# Altium PCB Ttem_Lumineux.PcbDoc
Units mm, origin at the board's own origin, x right, y up, seen from the top; angles counter-clockwise.
Board outline 109.47 x 87.25 mm, 2 copper layers (Top Layer, Bottom Layer); 60 components, 47 nets, 231 pads, 671 vias.
Unrouted connection lines stored in the file: 53.
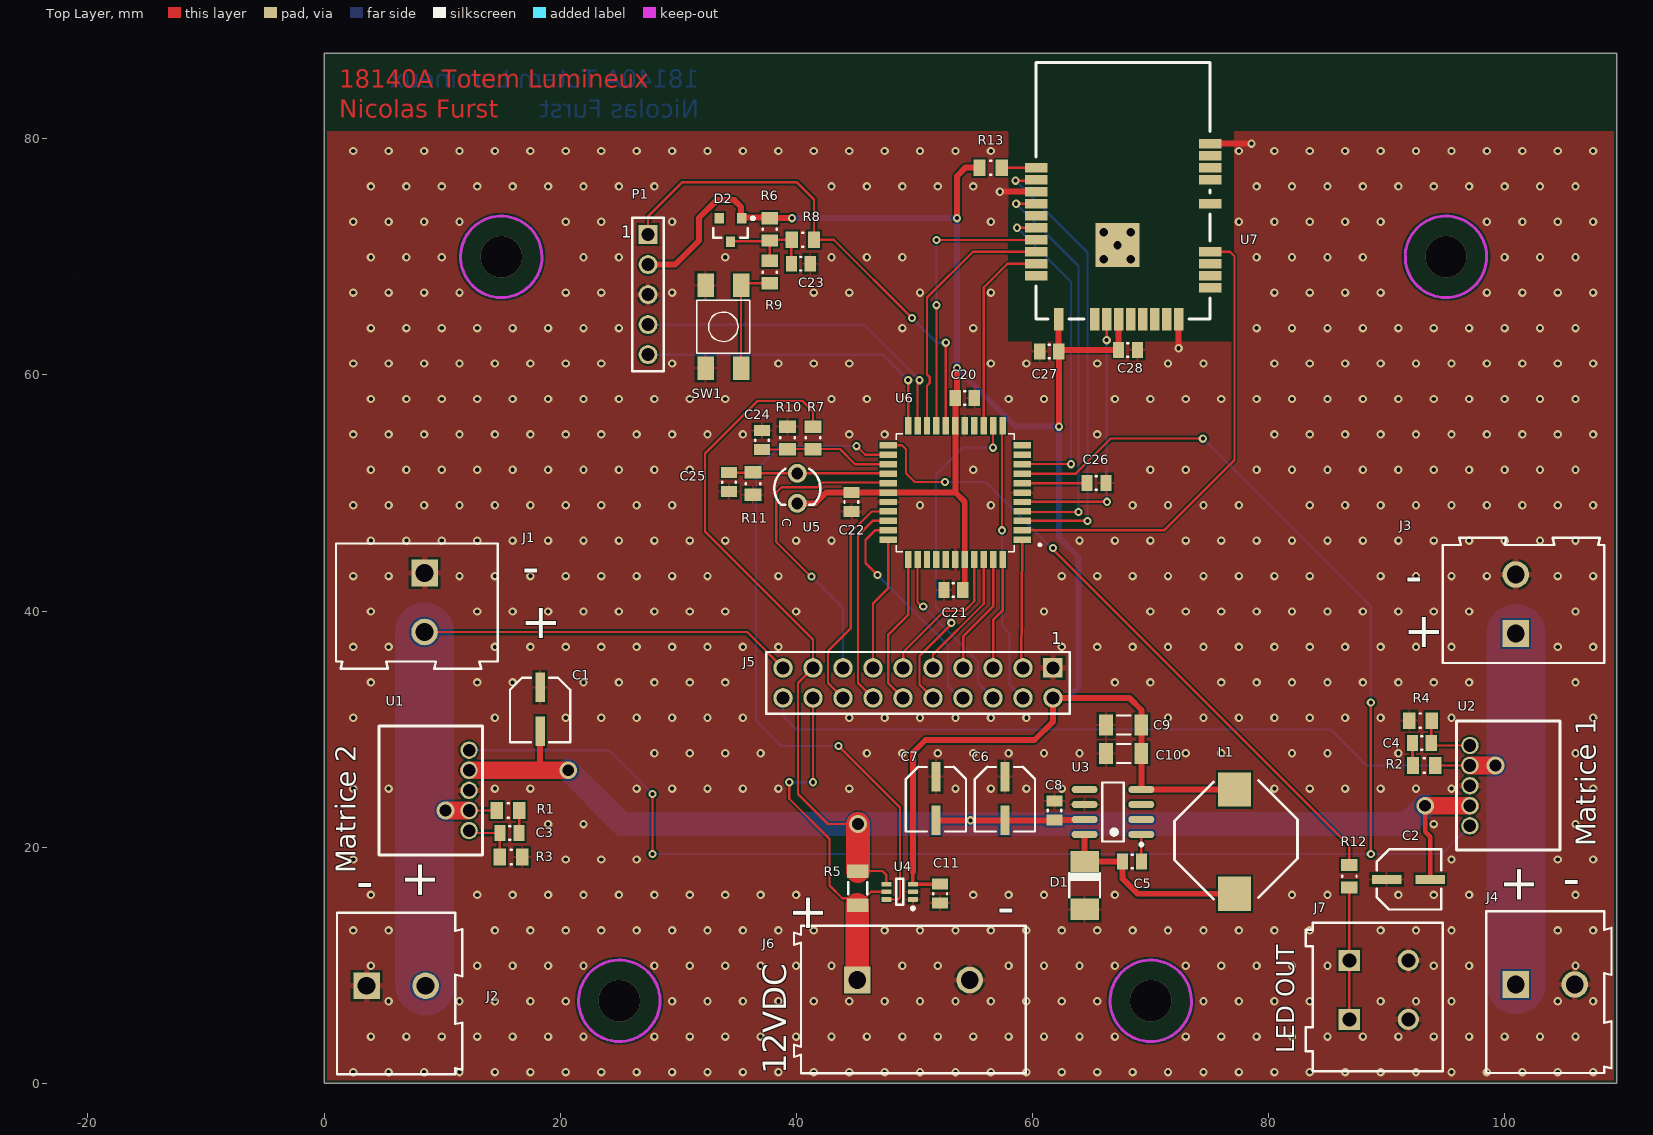
[diagram p0: Top Layer view]
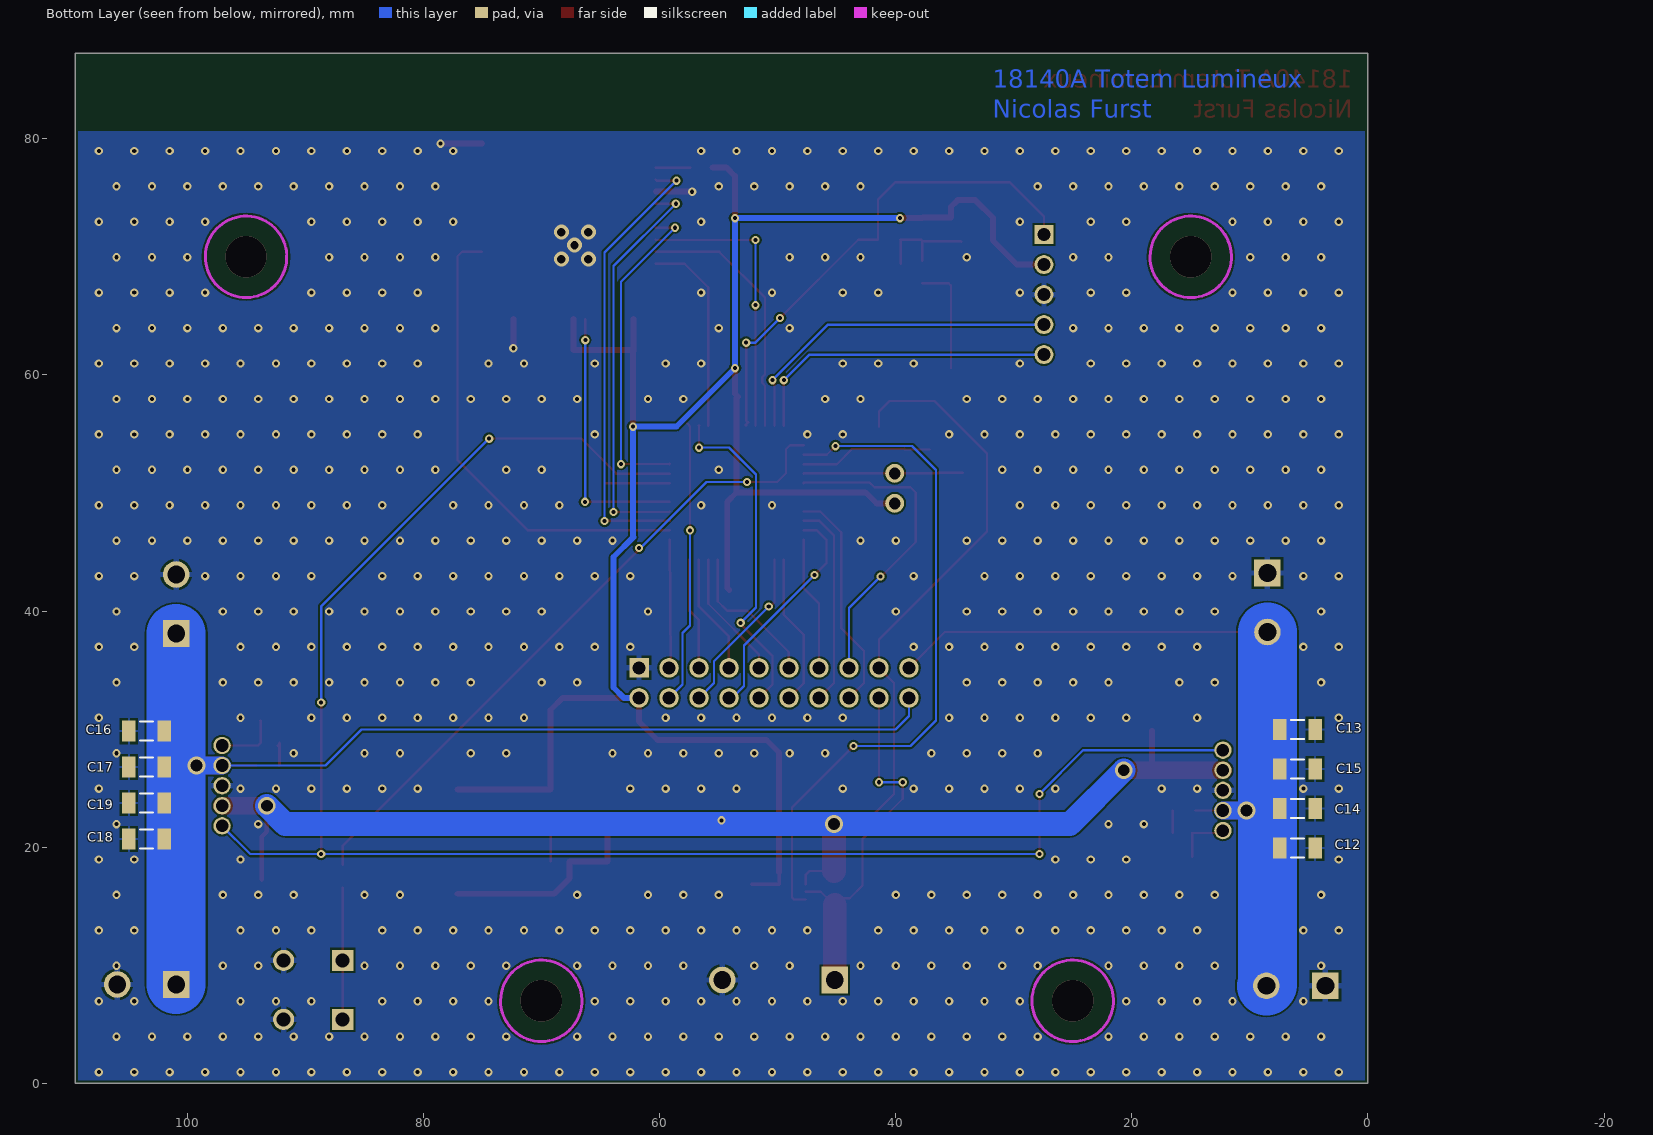
[diagram p1: Bottom Layer view, seen from below]

## Layer stack, top to bottom
Top Solder: solder mask 0.0102, Solder Resist, Dk 3.5
Top Layer: signal copper 0.0356
Dielectric 1: dielectric 0.32, FR-4, Dk 4.8
Bottom Layer: signal copper 0.0356
Bottom Solder: solder mask 0.0102, Solder Resist, Dk 3.5

## Board outline
0,0 0,87.249 109.474,87.249 109.474,0

## Design rules (kind name [scope] priority, off if disabled: settings)
BoardOutlineClearance [All] p1: gap=0.25 ignorepadtopadclearanceinfootprint=FALSE except(0: Arc-SplitContinuation Track-SplitContinuation SMDPad-SplitContinuation THPad-SplitContinuation Via-SplitContinuation Fill-SplitContinuation Poly-SplitContinuation Region-SplitContinuation Text-SplitContinuation)
Clearance Clearance-xPP-xTP-xTT [All] p1: gap=0.15 ignorepadtopadclearanceinfootprint=FALSE except(0: Arc-Hole Track-Hole SMDPad-Hole THPad-Hole Via-Hole Fill-Hole Poly-Hole Region-Hole Text-Hole)
ComponentClearance [All] p1: gap=0.25 collisioncheckmode=3 verticalgap=0.25 showdistances=FALSE
DiffPairsRouting [All] p1: maxlimit=0.25 minlimit=0.25 mostfreqgap=0.25 toplayer_minwidth=0.381 toplayer_maxwidth=0.381 toplayer_prefwidth=0.381 bottomlayer_minwidth=0.381 bottomlayer_maxwidth=0.381 bottomlayer_prefwidth=0.381 maxuncoupledlength=12.5
Height [All] p1: minheight=0 maxheight=25 prefheight=12.5
HoleSize HoleSize-PTH [All] p1: absolutevalues=TRUE maxlimit=10 minlimit=0.25 maxpercent=80.000 minpercent=20.000
HoleToHoleClearance [All] p1: gap=0.35 allowstackedmicrovias=TRUE
MinimumAnnularRing "Minimum IAR  >0.45mm" [((ObjectKind = 'Pad') OR (ObjectKind = 'Via')) And (Layer = 'MultiLayer') And (HoleDiameter > AsMM(0.45))] p1: minimumring=0.175 // minimum inner annular ring for pads > 0.45mm finished hole size
MinimumAnnularRing "Minimum IAR <=0.45mm" [((ObjectKind = 'Pad') OR (ObjectKind = 'Via')) And (Layer = 'MultiLayer') And (HoleDiameter <= AsMM(0.45))] p2: minimumring=0.175 // minimum inner annular ring for pads <= 0.45mm finished hole size
MinimumSolderMaskSliver [All] p1: minsoldermaskwidth=0.08
PlaneClearance PlaneClearance-IPI [All] p1: clearance=0.25
PlaneConnect [All] p1: planeconnectstyle=Relief reliefexpansion=0.175 reliefentries=4 reliefconductorwidth=0.2 reliefairgap=0.2
PolygonConnect PolygonConnect-xTW [All] p1: thpad.connectstyle=Relief thpad.reliefconductorwidth=0.5 thpad.reliefentries=4 thpad.polygonreliefangle="90 Angle" thpad.airgapwidth=0.2 smdpad.connectstyle=Relief smdpad.reliefconductorwidth=0.2 smdpad.reliefentries=4 smdpad.polygonreliefangle="90 Angle" smdpad.airgapwidth=0.2 via.connectstyle=Direct via.reliefconductorwidth=0.2 via.reliefentries=4 via.polygonreliefangle="90 Angle" via.airgapwidth=0.2
RoutingCorners [All] p1: cornerstyle=45-Degree minsetback=2.5 maxsetback=2.5
RoutingVias RoutingViasES [(ObjectKind = 'Via')] p1: holewidth=0.3 width=0.65 viastyle="Through Hole" minholewidth=0.25 minwidth=0.61 maxholewidth=0.45 maxwidth=0.8 // finishet hole size <= 0.45mm
SilkToSilkClearance [All] p1: silktosilkclearance=0.2
SilkToSolderMaskClearance SilkscreenOverComponentPads [IsPad] p1: minsilkscreentomaskgap=0.2 clearancetoexposedcopper=TRUE
SolderMaskExpansion [All] p1: expansion=0
UnRoutedNet [All] p1: checkbadconnections=TRUE
Width Width-xTW [All] p1: maxlimit=10 minlimit=0.15 preferedwidth=0.2
18 further rules are at their usual default settings.

## Classes and differential pairs
net class Power: 5V_1 5V_2 12Vbatt Vbatt
component class Pic: C20 C21 C22 C23 C24 C25 C26 C27 C28 D2 J7 P1 R6 R7 R8 R9 R10 R11 R12 R13 SW1 U5 U6 U7
component class Alim: C1 C2 C3 C4 C5 C6 C7 C8 C9 C10 C11 C12 C13 C14 C15 C16 C17 C18 C19 D1 J1 J2 J3 J4 J5 J6 L1 R1 R2 R3 R4 R5 U1 U2 U3 U4

## Components (designator, comment, footprint, x,y, rotation, side; value= is the part's Value field where it differs from the comment)
C1 "47uF" Capacitor 18.288,31.695 r90 top
C2 "47uF" Capacitor 91.821,17.272 r180 top
C3 "39nF" CAPC0805(2012)155_L 15.708,21.209 r0 top value=4.7uF
C4 "39nF" CAPC0805(2012)155_L 92.964,28.829 r0 top value=4.7uF
C5 "10nF" CAPC0805(2012)155_L 68.419,18.796 r180 top value=4.7uF
C6 "47uF" Capacitor 57.658,24.13 r90 top
C7 "47uF" Capacitor 51.816,24.13 r90 top
C8 "100n" CAPC0805(2012)155_L 61.849,23.114 r90 top value=4.7uF
C9 "47uF" CAPC1206(3216)190_N 67.715,30.353 r0 top
C10 "47uF" CAPC1206(3216)190_N 67.715,27.94 r0 top
C11 "100n" CAPC0805(2012)155_L 52.17,16.079 r270 top value=4.7uF
C12 "47uF" CAPC1206(3216)190_N 5.969,19.939 r0 bottom
C13 "47uF" CAPC1206(3216)190_N 5.969,29.972 r0 bottom
C14 "47uF" CAPC1206(3216)190_N 5.969,23.283 r0 bottom
C15 "47uF" CAPC1206(3216)190_N 5.969,26.628 r0 bottom
C16 "47uF" CAPC1206(3216)190_N 103.426,29.845 r180 bottom
C17 "47uF" CAPC1206(3216)190_N 103.426,26.797 r180 bottom
C18 "47uF" CAPC1206(3216)190_N 103.426,20.701 r180 bottom
C19 "47uF" CAPC1206(3216)190_N 103.426,23.749 r180 bottom
C20 "100n" CAPC0805(2012)155_L 54.255,58.039 r180 top value=4.7uF
C21 "100n" CAPC0805(2012)155_L 53.283,41.783 r0 top value=4.7uF
C22 "100n" CAPC0805(2012)155_L 44.647,49.238 r90 top value=4.7uF
C23 "" CAPC0805(2012)155_L 40.372,69.412 r180 top value=4.7uF
C24 "100n" CAPC0805(2012)155_L 37.084,54.483 r270 top value=4.7uF
C25 "100n" CAPC0805(2012)155_L 34.29,50.927 r90 top value=4.7uF
C26 "10uF" CAPC0805(2012)155_L 65.405,50.838 r180 top value=4.7uF
C27 "100n" CAPC0805(2012)155_L 61.403,61.976 r0 top value=4.7uF
C28 "100n" CAPC0805(2012)155_L 68.072,62.103 r180 top value=4.7uF
D1 "SK32" DO-214AC 64.402,16.771 r270 top
D2 "BAS40-06LT1G" ONSC-SOT-23-3-318-08_V 34.417,72.263 r270 top
J1 "691211720002" 691211720002 7.859,40.727 r270 top
J2 "691211720002" 691211720002 6.096,7.62 r0 top locked
J3 "691211720002" 691211720002 101.568,40.6 r90 top locked
J4 "691211720002" 691211720002 103.418,7.732 r0 top locked
J5 "61302021121" 61302021121 50.292,33.924 r180 top
J6 "691250910002" 691250910002 49.911,7.112 r0 top locked
J7 "691411710002B" 691411710002B 88.921,7.321 r0 top locked
L1 "DO3308P-684" DO3308P 77.089,17.522 r90 top
P1 "61300511121" 61300511121 27.432,66.802 r270 top
R1 "47R" RESC0805(2012)_N 15.581,23.114 r180 top value="1000000.00 Ohm"
R2 "47R" RESC0805(2012)_N 93.157,26.924 r0 top value="1000000.00 Ohm"
R3 "270R" RESC0805(2012)_N 15.835,19.177 r180 top value="1000000.00 Ohm"
R4 "270R" RESC0805(2012)_N 92.837,30.734 r0 top value="1000000.00 Ohm"
R5 "3mOhm" RESC1206(3216)_N 45.185,16.536 r270 top value="1000000.00 Ohm"
R6 "" RESC0805(2012)_N 37.743,72.333 r90 top value="1000000.00 Ohm"
R7 "82k" RESC0805(2012)_N 41.402,54.671 r90 top value="1000000.00 Ohm"
R8 "" RESC0805(2012)_N 40.537,71.444 r180 top value="1000000.00 Ohm"
R9 "" RESC0805(2012)_N 37.743,68.711 r90 top value="1000000.00 Ohm"
R10 "18k" RESC0805(2012)_N 39.243,54.671 r270 top value="1000000.00 Ohm"
R11 "300R" RESC0805(2012)_N 36.322,50.8 r90 top value="1000000.00 Ohm"
R12 "0R" RESC0805(2012)_N 86.821,17.547 r270 top value="1000000.00 Ohm"
R13 "1M" RESC0805(2012)_N 56.449,77.547 r180 top value="1000000.00 Ohm"
SW1 "430181038816" 430181038816 33.806,64.078 r90 top
U1 "DC-DC _12to5V" DC-DC 12.279,28.224 r270 top
U2 "DC-DC _12to5V" DC-DC 97.028,21.814 r90 top
U3 "LM2674M-3.3" M08A_N 66.802,22.987 r180 top
U4 "INA214AIDCKT" DCK0006A_N 48.741,16.229 r180 top
U5 "TEPT4400" "Type 3mm" 40.075,50.392 r270 top
U6 "PIC32MX130F256D" QFP80P1200X1200X120-44N 53.455,50.038 r180 top
U7 "ATWILC1000" ATWILC1000 60.303,64.723 r0 top locked

## Footprints (in the part's own frame and the unit in brackets; to place one, negate y for a bottom-side part, rotate by r counter-clockwise, add the part's x,y. Pads: shape width x height; smd on the part's side, far side on the other; paste and mask are expansions set on the pad)
61300511121 [mm] "Pin Header, pitch 2.54 mm, THT, Vertical, single row, 5p"
  rect 1.6x1.6 hole 1.1: 1(-5.08,0)
  round 1.6 hole 1.1: 2(-2.54,0) 3(0,0) 4(2.54,0) 5(5.08,0)
  silkscreen extent -6.5,-1.35 6.5,1.35, body extent -6.35,-1.27 6.35,1.27, height 8.57
61302021121 [mm] "Pin Header, pitch 2.54 mm, THT, Vertical, dual row, 20p"
  rect 1.65x1.65 hole 1.1: 1(-11.43,-1.27)
  round 1.65 hole 1.1: 2(-11.43,1.27) 3(-8.89,-1.27) 4(-8.89,1.27) 5(-6.35,-1.27) 6(-6.35,1.27) 7(-3.81,-1.27) 8(-3.81,1.27) 9(-1.27,-1.27) 10(-1.27,1.27) 11(1.27,-1.27) 12(1.27,1.27) 13(3.81,-1.27) 14(3.81,1.27) 15(6.35,-1.27) 16(6.35,1.27) 17(8.89,-1.27) 18(8.89,1.27) 19(11.43,-1.27) 20(11.43,1.27)
  silkscreen extent -12.85,-2.62 12.85,2.62, body extent -12.7,-2.54 12.7,2.54, height 8.59
430181038816 [mm] "4.5*4.5mm vertical type, SMD, height 3.8mm, black actuator, 160gf, T&R"
  rect 2x1.4 smd: 1(-3.5,1.5) 2(3.5,1.5) 3(-3.5,-1.5) 4(3.5,-1.5)
  silkscreen extent -2.25,-2.25 2.25,2.25, body extent -3.75,-2.25 3.75,2.25, height 3.78
691211720002 [mm] "5,00mm - modular - green -45° entry with rising cage clamp - 02p"
  rect 2.25x2.25 hole 1.5: 1(-2.5,0.65)
  round 2.25 hole 1.5: 2(2.5,0.65)
  silkscreen extent -5,-6.85 5.6,6.85, body extent -5,-6.85 5.6,6.85, height 15.72
691250910002 [mm] "Serie 2509 - 9.52 mm _ 2 pins"
  rect 2.25x2.25 hole 1.5: 1(-4.76,1.65)
  round 2.25 hole 1.5: 2(4.76,1.65)
  silkscreen extent -10.12,-6.25 9.52,6.25, body extent -10.12,-6.25 9.52,6.25, height 21.6
691411710002B [mm] "5.00 mm Screwless Horizontal Entry - 2.0 mm2 Wires, 2p"
  rect 1.8x1.8 hole 1.2: 1(-2.1,-1.9) 1(-2.1,3.1)
  round 1.8 hole 1.2: 2(2.9,-1.9) 2(2.9,3.1)
  silkscreen extent -5.8,-6.3 5.8,6.3, body extent -5.8,-6.3 5.8,6.3, height 15.65
ATWILC1000 [mm]
  rect 1.9x0.8 smd: 1(14.73,2.67) 2(14.73,3.686) 3(14.73,4.702) 4(14.73,5.718) 5(14.73,9.782) 6(14.73,11.814) 7(14.73,12.83) 8(14.73,13.846) 9(14.73,14.862) 10(0,12.824) 11(0,11.808) 12(0,10.792) 13(0,9.776) 14(0,8.76) 15(0,7.744) 16(0,6.728) 17(0,5.712) 18(0,4.696) 19(0,3.68)
  rect 0.8x1.9 smd: 20(1.9,0) 21(4.948,0) 22(5.964,0) 23(6.98,0) 24(7.996,0) 25(9.012,0) 26(10.028,0) 27(11.044,0) 28(12.06,0)
  rect 3.7x3.7 smd: 29(6.88,6.27)
  silkscreen extent 0,0 14.73,21.72
Capacitor [mm]
  rect 2.5x0.8 smd: 1(-1.85,0) 2(1.85,0)
  silkscreen extent -2.79,-2.55 2.67,2.55
CAPC0805(2012)155_L [mm] "Chip Capacitor, Body 2.0x1.2mm, Height 1.55mm, IPC High Density"
  rect 0.95x1.35 smd: 1(-0.8,0) 2(0.8,0)
  silkscreen extent -0.05,-0.58 0.05,0.58, body extent -1.1,-0.72 1.1,0.72, height 1.55
CAPC1206(3216)190_N [mm] "Chip Capacitor, Body 3.2x1.6mm, Height 1.9mm, IPC Medium Density"
  rect 1.15x1.8 smd: 1(-1.5,0) 2(1.5,0)
  silkscreen extent -0.55,-0.8 0.55,0.8, body extent -1.7,-0.9 1.7,0.9, height 1.9
DC-DC [mm]
  round 1.47 hole 1.07: 1(0,0) 2(1.7,0) 3(3.4,0) 4(5.11,0) 5(6.81,0)
  silkscreen extent -2.06,-7.62 8.86,1.14
DCK0006A_N [mm] "SOT23, 6-Leads, Body 2.15x1.4mm, Pitch 0.65mm, IPC Medium Density"
  rrect25% 0.85x0.4 smd: 1(-1.125,0.65) 2(-1.125,0) 3(-1.125,-0.65) 4(1.125,-0.65) 5(1.125,0) 6(1.125,0.65)
  silkscreen extent -1.25,-1.1 0.3,1.52, body extent -1.14,-1 1.14,1, height 0.94
DO3308P [mm]
  rect 2.92x2.79 smd: 1(-1.46,0) 2(7.37,0)
  silkscreen extent -1.91,-5.33 8.13,5.08
DO-214AC [mm]
  rect 1.8x2.4 smd: 1(-2.025,0) 2(2.025,0)
  silkscreen extent -1.06,-1.3 1.02,1.3
M08A_N [mm] "SOIC, 8-Leads, Body 4.9x3.9mm, Pitch 1.27mm, IPC Medium Density"
  oval 2.2x0.6 smd: 1(-2.4,1.905) 2(-2.4,0.635) 3(-2.4,-0.635) 4(-2.4,-1.905) 5(2.4,-1.905) 6(2.4,-0.635) 7(2.4,0.635) 8(2.4,1.905)
  silkscreen extent -2.53,-2.5 0.9,2.88, body extent -2,-2.5 2,2.5, height 1.75
ONSC-SOT-23-3-318-08_V [mm] "SOT23, 3-Leads, Body 2.92x1.3mm, Pitch 0.95mm"
  rect 0.9x0.8 smd: 1(-1,0.95) 2(-1,-0.95) 3(1,0)
  silkscreen extent -1.12,-1.46 0.65,2.03, body extent -0.65,-1.46 0.65,1.46, height 1.11
QFP80P1200X1200X120-44N [mm]
  rect 1.47x0.55 smd: 1(-5.67,4) 2(-5.67,3.2) 3(-5.67,2.4) 4(-5.67,1.6) 5(-5.67,0.8) 6(-5.67,0) 7(-5.67,-0.8) 8(-5.67,-1.6) 9(-5.67,-2.4) 10(-5.67,-3.2) 11(-5.67,-4) 23(5.67,-4) 24(5.67,-3.2) 25(5.67,-2.4) 26(5.67,-1.6) 27(5.67,-0.8) 28(5.67,0) 29(5.67,0.8) 30(5.67,1.6) 31(5.67,2.4) 32(5.67,3.2) 33(5.67,4)
  rect 0.55x1.47 smd: 12(-4,-5.67) 13(-3.2,-5.67) 14(-2.4,-5.67) 15(-1.6,-5.67) 16(-0.8,-5.67) 17(0,-5.67) 18(0.8,-5.67) 19(1.6,-5.67) 20(2.4,-5.67) 21(3.2,-5.67) 22(4,-5.67) 34(4,5.67) 35(3.2,5.67) 36(2.4,5.67) 37(1.6,5.67) 38(0.8,5.67) 39(0,5.67) 40(-0.8,5.67) 41(-1.6,5.67) 42(-2.4,5.67) 43(-3.2,5.67) 44(-4,5.67)
  silkscreen extent -7.26,-5 5,5
RESC0805(2012)_N [mm] "Chip Resistor, Body 2.0x1.3mm, IPC Medium Density"
  rect 1.05x1.4 smd: 1(-0.95,0) 2(0.95,0)
  silkscreen extent -0.05,-0.6 0.05,0.6, body extent -1.1,-0.67 1.1,0.68, height 0.7
RESC1206(3216)_N [mm] "Chip Resistor, Body 3.2x1.6mm, IPC Medium Density"
  rect 1.15x1.8 smd: 1(-1.45,0) 2(1.45,0)
  silkscreen extent -0.5,-0.8 0.5,0.8, body extent -1.67,-0.87 1.67,0.87, height 0.75
"Type 3mm" [mm] "THT, LED-3mm, 2pin- Body 4.15mm(max)"
  round 1.6 hole 1: 1(1.27,0) 2(-1.27,0)
  silkscreen extent -1.66,-1.95 1.4,1.95, body extent -1.93,-1.94 1.87,1.94, height 10.5

## Part data
C1 C2 C6 C7: library part CMP-2000-06221-1, "Conductive Polymer Hybrid Aluminum Electrolytic Capacitor, 100 uF, +/- 20%, 50 V, -55 to 105 degC, 2-Pin SMD (G), RoHS, Tape and Reel", Capacitance=100uF, Case Diameter=10mm, Case Height=10.5mm, Case Length=10.2mm, Manufacturer=Panasonic, Maximum Operating Temperature=+105C, Minimum Operating Temperature=-55C, Package Description="2-Pin Surface Mount Device, Body 10.3 x 10.3 mm", Package Reference=ZA-G, Ripple Current=2A, Tolerance=20%, Voltage Rating DC=50V, Brand=Panasonic, Datasheet URL=https://industrial.panasonic.com/cdbs/www-data/pdf/RDD0000/DMD0000COL56.pdf, Datasheet Version=06/2016, ESR=28mOhms, Factory Pack Quantity=500, Height=10.5mm, Load Life=10000Hour, Manufacturer URL=http://www.panasonic.com/, Mounting Technology=SurfaceMount, Packaging=Reel, Product=AluminumElectrolyticCapacitors, Product Category=AluminumOrganicPolymerCapacitors, RoHS=Details, Series=ZA, Termination Style=SMD/SMT
C3 C4 C5 C8 C11 C20 C21 C22 C23 C24 C25 C26 C27 C28: library part Capa, Case-EIA=0805, Case-Metric=2012, Rated Voltage="10 V", Tolerance=±10%, Max Thickness="1.55 mm", Technology=SMT
C9 C10 C12 C13 C14 C15 C16 C17 C18 C19: library part CMP-1037-05002-1, "CAP 47uF 10V ±20% 1206 (3216 Metric) Thickness 1.9mm SMD", Case-EIA=1206, Case-Metric=3216, Rated Voltage="10 V", Tolerance=±20%, Max Thickness="1.9 mm", Technology=SMT
D1: "Shotky diod", Emitting color="Super Red", Manufacturer="Wuerth Elektronik", PartNumber=151031SS04000, ComponentLink1Description="Manufacturer URL", ComponentLink1URL=http://www.we-online.com, ComponentLink2Description=Datasheet, ComponentLink2URL=http://katalog.we-online.de/pbs/datasheet/7448042001.pdfhttp://katalog.we-online.de/pbs/datasheet/7448042001.pdfhttp://katalog.we-online.de/pbs/datasheet/7448042001.pdfhttp://katalog.we-online.de/pbs/datasheet/151031SS04000.pdf, PackageReference="Type 3mm"
D2: library part CMP-1055-00547-1, "Common Anode Schottky Barrier Diodes, 3-Pin SOT-23, Pb-Free, Tape and Reel", Manufacturer="On Semiconductor", ComponentLink1Description="Manufacturer URL", ComponentLink1URL=http://www.onsemi.com/, ComponentLink2Description=Datasheet, ComponentLink2URL=http://www.onsemi.cn/pub_link/Collateral/BAS40-06LT1-D.PDF, ComponentLink3Description="Package Specification", ComponentLink3URL=http://www.onsemi.cn/pub_link/Collateral/318-08.PDF, Configuration="Common Anode", DatasheetVersion="Rev. 8", Mounting Technology="Surface Mount", PackageDescription="3-Pin Small Outline Transistor, Body 2.92 x 1.3 mm, Pitch 0.95 mm", PackageReference=SOT-23-3-318-08, PackageVersion="Rev. AP, 11/2009", Packing="Tape and Reel", PartNumber=BAS40-06LT1G, RoHS=TRUE
J1 J2 J3 J4: library part CMP-1502-02524-1, "Serie 211 - 5.00 mm 45deg Entry Modular with Rising Cage Clamp - 15.50 mm Height WR-TBL, 2 pin", Manufacturer="Wurth Elektronik", Operating Temperature=-40to105degC, Datasheet URL=http://katalog.we-online.de/em/datasheet/6912117200xx.pdf, Manufacturer URL=http://www.we-online.de, Mounting Technology=THT, Package Reference=691211720002, Packaging=Box, Part Number=691211720002, Pin Number=2, Pitch=5.00mm, Publisher=WurthElektronik
J5: library part CMP-1502-01104-1, "THT Vertical Pin Header WR-PHD, Pitch 2.54 mm, Dual Row, 20 pins", Contact Resistance=20mOhm, Manufacturer="Wurth Elektronik", Operating Temperature=-40to105degC, Rated Current=3A, Withstanding Voltage=500VAC, Working Voltage=250VAC, Datasheet URL=https://katalog.we-online.de/em/datasheet/6130xx21121.pdf, Gender=Male, Manufacturer URL=http://www.we-online.de, Mounting Technology=THT, Orientation=Vertical, Package Reference=61302021121, Packaging=Bag, Part Number=61302021121, Pin Number=20, Pitch=2.54mm, Publisher=WurthElektronik, Row Number=Dual
J6: library part CMP-1502-02750-1, "Serie 2509 - 9.52 mm Horizontal Entry Modular with Rising Cage Clamp WR-TBL, 2 pin", Manufacturer="Wurth Elektronik", Operating Temperature=-30to120degC, Datasheet URL=http://katalog.we-online.de/em/datasheet/6912509100XX.pdf, Manufacturer URL=http://www.we-online.de, Mounting Technology=THT, Package Reference=691250910002, Packaging=Box, Part Number=691250910002, Pin Number=2, Pitch=9.52mm, Publisher=WurthElektronik
J7: library part CMP-1502-03026-1, "Serie 411 B - 5.00mm Screwless Horizontal Entry-2.0mm2 Wires WR-TBL, 2 pin", Manufacturer="Wurth Elektronik", Operating Temperature=-40to105degC, Datasheet URL=http://katalog.we-online.de/em/datasheet/6914117100xxB.pdf, Manufacturer URL=http://www.we-online.de, Mounting Technology=THT, Package Reference=691411710002B, Packaging=Box, Part Number=691411710002B, Pin Number=2, Pitch=5.00mm, Publisher=WurthElektronik
P1: library part CMP-1502-01068-1, "THT Vertical Pin Header WR-PHD, Pitch 2.54 mm, Single Row, 5 pins", Contact Resistance=20mOhm, Manufacturer="Wurth Elektronik", Operating Temperature=-40to105degC, Rated Current=3A, Withstanding Voltage=500VAC, Working Voltage=250VAC, Datasheet URL=https://katalog.we-online.de/em/datasheet/6130xx11121.pdf, Gender=Male, Manufacturer URL=http://www.we-online.de, Mounting Technology=THT, Orientation=Vertical, Package Reference=61300511121, Packaging=Bag, Part Number=61300511121, Pin Number=5, Pitch=2.54mm, Publisher=WurthElektronik, Row Number=Single
R1 R2 R3 R4 R5 R6 R7 R8 R9 R10 R11 R12 R13: library part Resistor, Case-EIA=0805, Case-Metric=2012, Power="0.125 W", Tolerance="1 %", Technology=SMT
SW1: library part CMP-1454-00001-1, "WS-TASV SMD Tact Switch 4.5X4.5 mm", Manufacturer="Wuerth Elektronik", ComponentLink1Description="Manufacturer URL", ComponentLink1URL=http://www.we-online.com, ComponentLink2Description=Datasheet, ComponentLink2URL=http://katalog.we-online.de/em/datasheet/430181038816.pdf, NoPins=04, PackageReference=430181038816, PartNumber=430181038816
U3: library part CMP-0069-00679-2, "SIMPLE SWITCHER® Power Converter High Efficiency 500mA Step-Down Voltage Regulator, 8-pin Narrow SOIC", Manufacturer="National Semiconductor", PackageTopMarking=NSZXTT*2674*M3.3, PowerWise=N, Code_IPC=SOIC127P600-8, Code_JEDEC=MS-012-AA, ComponentLink1Description="LM2674 Datasheet", ComponentLink1URL=http://www.national.com/ds/LM/LM2674.pdf, ComponentLink2Description="LM2674 Web Page", ComponentLink2URL=http://www.national.com/pf/LM/LM2674.html, ComponentLink3Description="M08A Package Page", ComponentLink3URL=http://www.national.com/packaging/folders/m08a.html, CompType=Switcher, DatasheetVersion=Mar-2005, PackageDescription="SOIC Narrow, 4.9 x 3.9 x 1.45mm, 8 Lead, 1.27mm Pitch", PackageReference=M08A, PackageVersion="revM, May-2009", PinCount=8, RevisionNote="Component URLs added", RoHS=N
U4: library part CMP-2000-06456-1, "Voltage Output, High / Low-Side Measurement, Bi-Directional Zero-Drift Series, Current Shunt Monitor, 2.7 to 26 V, -40 to 125 degC, 6-Pin SOT-23 (DCK6), Green (RoHS & no Sb/Br), Tape and Reel", Manufacturer=TexasInstruments, Maximum Operating Temperature=+125C, Minimum Operating Temperature=-40C, Operating Supply Current=115uA, Package / Case=SOT-23-6, Package Description="6-Pin Plastic Small Outline, Body 2 x 1.25 mm, Pitch 0.65 mm", Package Reference=DCK6, Package Version="4093553-4/G, 01/2007", Supply Voltage - Max=26V, Supply Voltage - Min=2.7V, Vcm - Common Mode Voltage=-0.3Vto+26V, Vos - Input Offset Voltage=60uV, Accuracy=1%, Amplifier Type=CurrentSense, Brand=TexasInstruments, CMRR - Common Mode Rejection Ratio=105dB, Datasheet URL=http://www.ti.com/lit/gpn/INA214?keyMatch=INA214AIDCKT&tisearch=Search-EN-Everything, Datasheet Version="Rev. G, 07/2014", Development Kit=INA210-214EVM, Gain Error=0.02%, Gain V/V=100V/V, GBP - Gain Bandwidth Product=30kHz, Manufacturer URL=http://www.ti.com/, Mounting Style=SMD/SMT, Mounting Technology=SurfaceMount, Number of Channels=1Channel, Packaging=Reel, Product=CurrentSenseAmplifiers, Product Category=CurrentSenseAmplifiers, RoHS=True, Series=INA214, Topology=CurrentShuntFeedback, Unit Weight=0.000088oz
U6: Manufacturer=Microchip, PartNumber=PIC32MX130F064D-I/TL, ComponentLink1Description="Manufacturer URL", ComponentLink1URL=http://www.microchip.com, ComponentLink2Description=Datasheet, ComponentLink2URL=http://ww1.microchip.com/downloads/en/DeviceDoc/61168E.pdf, ComponentLink3Description="Package Specification", ComponentLink3URL=http://www.microchip.com/stellent/groups/techpub_sg/documents/packagingspec/en012702.pdf, ComponentLink4Description="Product URL", ComponentLink4URL=http://www.microchip.com/PIC32MX130F064D, DatasheetVersion="Rev. E", Mounting Technology="Surface Mount", PackageDescription="44-Lead Terminal Very Thin Leadless Array Package, 6 x 6 mm Body, 0.5 mm Pitch", PackageReference=VTLA-TL44, PackageVersion=C04-157C

## Via types
v1: diameter 0.71, hole 0.35, Top Layer to Bottom Layer, tented both sides, 657 vias
v2: diameter 1.5, hole 1, Top Layer to Bottom Layer, 5 vias
v3: diameter 1.27, hole 0.711, Top Layer to Bottom Layer, 5 vias
v4: diameter 3.5, hole 3.5, Top Layer to Bottom Layer, 4 vias

## Nets (pads, with @x,y where several pads share a name; then routed paths per layer and width w, separated by ;. In a path a pad name is that pad's centre, name@x,y a point inside that pad or via, vN(x,y) a via of type N, cw(c..) or ccw(c..) an arc to the next point about the centre after c; other vN are vias at no path point)
3V3: C9.2 C10.2 C11.1 C20.2 C21.2 C22.2 C27.2 C28.2 D2.1 J5.2 L1.2 P1.2 R6.2 R13.2 U3.4 U4.3 U5.1 U6.17 U6.28 U6.40 U7.20 U7.23 | length 186.1
  Top Layer w0.3: 49.866,17.907 U4.3 C11.1
  Top Layer w0.5: P1.2 29.718,69.342 31.75,71.374 31.75,73.295 33.258,74.803 34.738,74.803 35.306,74.235 35.306,73.333 37.693,73.333 R6.2 37.747,73.279 v1(39.624,73.279) ; U5.1 41.617,49.122 42.533,50.038 C22.2 U6.28 53.467,50.038 ; 49.866,17.907 49.866,28.022 50.927,29.083 60.164,29.083 61.722,30.641 J5.2 68.184,32.654 69.215,31.623 C9.2 C10.2 69.215,24.905 U3.4 L1.2 ; v1(53.594,60.578) 53.594,58.408 53.34,58.154 C20.2 U6.17 53.455,50.05 53.467,50.038 ; v1(53.594,73.279) 53.594,76.835 54.306,77.547 R13.2 ; C21.2 54.255,41.955 U6.40 54.255,49.25 53.467,50.038 ; U7.20 C27.2 ; v1(62.23,55.626) 62.23,61.949 C27.2 ; U7.23 67.283,62.114 C28.2 62.33,62.103 C27.2
  Bottom Layer w0.5: v1(39.624,73.279) v1(53.594,73.279) v1(53.594,60.578) 58.546,55.626 v1(62.23,55.626) 62.23,46.282 62.203,46.255 63.881,44.577 63.881,33.528 63.007,32.654 J5.2
5V_1: C12.2 C13.2 C14.2 C15.2 J1.2 J2.2 J5.19 R1.2 U1.4 | length 67.9
  Top Layer w0.2: J1.2 35.829,38.227 J5.19 ; U1.4 R1.2
  Top Layer w1.5: v2(10.287,23.114) U1.4
  Bottom Layer w1.5: v2(10.287,23.114) U1.4
  Bottom Layer w5: J1.2 8.509,8.357 J2.2
5V_2: C16.2 C17.2 C18.2 C19.2 J3.1 J4.1 J5.20 R2.2 U2.4 | length 100.1
  Top Layer w0.2: R2.2 U2.4
  Top Layer w1.5: U2.4 v2(99.187,26.924)
  Bottom Layer w0.2: J5.20 38.862,31.115 40.005,29.972 85.217,29.972 88.265,26.924 U2.4 ; v2(99.187,26.924) 100.918,26.924
  Bottom Layer w1.5: U2.4 v2(99.187,26.924)
  Bottom Layer w5: J4.1 100.918,26.924 J3.1
12Vbatt: C1.1 C2.1 C6.1 C7.1 C8.1 J5.17 R5.1 R7.2 U1.2 U2.2 U3.7 U4.4 | length 168.9
  Top Layer w0.2: R7.2 41.402,56.896 40.513,57.785 36.703,57.785 32.258,53.34 32.258,46.736 41.402,37.592 J5.17 40.132,33.924 40.132,24.511 42.672,21.971 v2(45.212,21.971) ; R5.1 47.292,17.986 47.616,17.662 U4.4
  Top Layer w0.4: v2(93.237,23.514) 93.237,21.317 93.671,20.883 C2.1
  Top Layer w0.5: 18.288,26.524 C1.1 ; C7.1 v1(54.737,22.28) C6.1 61.815,22.28 C8.1 64.364,22.314 U3.7
  Top Layer w1.5: U1.2 18.288,26.524 v2(20.682,26.524) ; v2(93.237,23.514) U2.2
  Top Layer w2: R5.1 45.212,18.013 v2(45.212,21.971)
  Bottom Layer w2: v2(20.682,26.524) 25.235,21.971 v2(45.212,21.971) 91.694,21.971 v2(93.237,23.514)
GND: C1.2 C2.2 C6.2 C7.2 C8.2 C9.1 C10.1 C11.2 C12.1 C13.1 C14.1 C15.1 C16.1 C17.1 C18.1 C19.1 C20.1 C21.1 C22.1 C23.1 C24.1 C25.1 C26.1 C27.1 C28.1 D1.2 J1.1 J2.1 J3.2 J4.2 J5.1 J6.2 J7.2 P1.3 R3.1 R4.1 R10.1 R11.1 SW1.1 SW1.2 U1.3 U2.3 U3.6 U4.1 U4.2 U6.6 U6.16 U6.29 U6.39 U7.9 U7.12 U7.28 U7.29 | length 9
  Top Layer w0.5: v1(57.227,75.515) U7.12 ; v1(72.363,62.257) U7.28 ; U7.9 v1(78.53,79.585)
  other v1: 2.467,0.965 5.467,0.965 8.467,0.965 11.467,0.965 14.467,0.965 17.467,0.965 20.467,0.965 23.467,0.965 26.467,0.965 29.467,0.965 32.467,0.965 35.467,0.965 38.467,0.965 41.467,0.965 44.467,0.965 47.467,0.965 50.467,0.965 53.467,0.965 56.467,0.965 59.467,0.965 62.467,0.965 65.467,0.965 68.467,0.965 71.467,0.965 74.467,0.965 77.467,0.965 80.467,0.965 83.467,0.965 86.467,0.965 89.467,0.965 92.467,0.965 95.467,0.965 98.467,0.965 101.467,0.965 104.467,0.965 107.467,0.965 3.967,3.965 6.967,3.965 9.967,3.965 12.967,3.965 15.967,3.965 18.967,3.965 21.967,3.965 27.967,3.965 30.967,3.965 33.967,3.965 36.967,3.965 39.967,3.965 42.967,3.965 45.967,3.965 48.967,3.965 51.967,3.965 54.967,3.965 57.967,3.965 60.967,3.965 63.967,3.965 66.967,3.965 72.967,3.965 75.967,3.965 78.967,3.965 81.967,3.965 84.967,3.965 87.967,3.965 90.967,3.965 93.967,3.965 96.967,3.965 99.967,3.965 102.967,3.965 105.967,3.965 5.467,6.965 11.467,6.965 14.467,6.965 17.467,6.965 20.467,6.965 29.467,6.965 32.467,6.965 35.467,6.965 38.467,6.965 41.467,6.965 44.467,6.965 47.467,6.965 50.467,6.965 53.467,6.965 56.467,6.965 59.467,6.965 62.467,6.965 65.467,6.965 74.467,6.965 77.467,6.965 80.467,6.965 83.467,6.965 89.467,6.965 92.467,6.965 95.467,6.965 104.467,6.965 107.467,6.965 3.967,9.965 12.967,9.965 15.967,9.965 18.967,9.965 21.967,9.965 27.967,9.965 30.967,9.965 33.967,9.965 36.967,9.965 39.967,9.965 42.967,9.965 48.967,9.965 51.967,9.965 57.967,9.965 60.967,9.965 63.967,9.965 66.967,9.965 72.967,9.965 75.967,9.965 78.967,9.965 81.967,9.965 84.967,9.965 93.967,9.965 96.967,9.965 105.967,9.965 2.467,12.965 5.467,12.965 14.467,12.965 17.467,12.965 20.467,12.965 23.467,12.965 26.467,12.965 29.467,12.965 32.467,12.965 35.467,12.965 38.467,12.965 41.467,12.965 47.467,12.965 50.467,12.965 53.467,12.965 56.467,12.965 59.467,12.965 62.467,12.965 65.467,12.965 68.467,12.965 71.467,12.965 74.467,12.965 77.467,12.965 80.467,12.965 83.467,12.965 89.467,12.965 92.467,12.965 95.467,12.965 104.467,12.965 107.467,12.965 3.967,15.965 12.967,15.965 15.967,15.965 18.967,15.965 21.967,15.965 24.967,15.965 27.967,15.965 30.967,15.965 33.967,15.965 36.967,15.965 39.967,15.965 54.967,15.965 57.967,15.965 60.967,15.965 66.967,15.965 81.967,15.965 84.967,15.965 90.967,15.965 93.967,15.965 96.967,15.965 105.967,15.965 2.467,18.965 20.467,18.965 23.467,18.965 26.467,18.965 95.467,18.965 104.467,18.965 107.467,18.965 18.967,21.965 21.967,21.965 93.967,21.965 105.967,21.965 2.467,24.965 5.467,24.965 14.467,24.965 17.467,24.965 26.467,24.965 29.467,24.965 32.467,24.965 35.467,24.965 38.467,24.965 44.467,24.965 53.467,24.965 56.467,24.965 59.467,24.965 62.467,24.965 80.467,24.965 83.467,24.965 86.467,24.965 89.467,24.965 92.467,24.965 95.467,24.965 107.467,24.965 27.967,27.965 30.967,27.965 33.967,27.965 36.967,27.965 45.967,27.965 48.967,27.965 51.967,27.965 54.967,27.965 57.967,27.965 60.967,27.965 63.967,27.965 72.967,27.965 75.967,27.965 81.967,27.965 84.967,27.965 90.967,27.965 105.967,27.965 2.467,30.965 14.467,30.965 20.467,30.965 23.467,30.965 26.467,30.965 29.467,30.965 32.467,30.965 35.467,30.965 44.467,30.965 47.467,30.965 50.467,30.965 53.467,30.965 56.467,30.965 59.467,30.965 71.467,30.965 74.467,30.965 77.467,30.965 80.467,30.965 83.467,30.965 86.467,30.965 89.467,30.965 95.467,30.965 107.467,30.965 3.967,33.965 12.967,33.965 15.967,33.965 21.967,33.965 24.967,33.965 27.967,33.965 30.967,33.965 33.967,33.965 66.967,33.965 69.967,33.965 75.967,33.965 78.967,33.965 81.967,33.965 84.967,33.965 87.967,33.965 90.967,33.965 93.967,33.965 96.967,33.965 105.967,33.965 2.467,36.965 5.467,36.965 14.467,36.965 17.467,36.965 20.467,36.965 23.467,36.965 26.467,36.965 29.467,36.965 32.467,36.965 35.467,36.965 38.467,36.965 62.467,36.965 65.467,36.965 68.467,36.965 71.467,36.965 74.467,36.965 77.467,36.965 80.467,36.965 83.467,36.965 86.467,36.965 89.467,36.965 92.467,36.965 95.467,36.965 104.467,36.965 107.467,36.965 3.967,39.965 12.967,39.965 15.967,39.965 18.967,39.965 21.967,39.965 24.967,39.965 27.967,39.965 30.967,39.965 33.967,39.965 39.967,39.965 60.967,39.965 69.967,39.965 72.967,39.965 75.967,39.965 78.967,39.965 81.967,39.965 84.967,39.965 87.967,39.965 90.967,39.965 93.967,39.965 96.967,39.965 105.967,39.965 2.467,42.965 5.467,42.965 11.467,42.965 14.467,42.965 17.467,42.965 20.467,42.965 23.467,42.965 26.467,42.965 29.467,42.965 32.467,42.965 38.467,42.965 62.467,42.965 65.467,42.965 68.467,42.965 71.467,42.965 74.467,42.965 77.467,42.965 80.467,42.965 83.467,42.965 89.467,42.965 92.467,42.965 95.467,42.965 98.467,42.965 104.467,42.965 107.467,42.965 3.967,45.965 6.967,45.965 9.967,45.965 12.967,45.965 15.967,45.965 18.967,45.965 21.967,45.965 24.967,45.965 27.967,45.965 30.967,45.965 33.967,45.965 39.967,45.965 42.967,45.965 63.967,45.965 66.967,45.965 69.967,45.965 72.967,45.965 75.967,45.965 78.967,45.965 81.967,45.965 84.967,45.965 87.967,45.965 90.967,45.965 93.967,45.965 96.967,45.965 99.967,45.965 102.967,45.965 105.967,45.965 2.467,48.965 5.467,48.965 8.467,48.965 11.467,48.965 14.467,48.965 17.467,48.965 20.467,48.965 23.467,48.965 26.467,48.965 29.467,48.965 50.467,48.965 56.467,48.965 68.467,48.965 71.467,48.965 74.467,48.965 77.467,48.965 83.467,48.965 86.467,48.965 89.467,48.965 92.467,48.965 95.467,48.965 98.467,48.965 101.467,48.965 104.467,48.965 107.467,48.965 3.967,51.965 6.967,51.965 9.967,51.965 12.967,51.965 15.967,51.965 18.967,51.965 21.967,51.965 24.967,51.965 27.967,51.965 30.967,51.965 54.967,51.965 69.967,51.965 72.967,51.965 78.967,51.965 81.967,51.965 84.967,51.965 87.967,51.965 90.967,51.965 93.967,51.965 96.967,51.965 99.967,51.965 102.967,51.965 105.967,51.965 2.467,54.965 5.467,54.965 8.467,54.965 11.467,54.965 14.467,54.965 17.467,54.965 20.467,54.965 23.467,54.965 26.467,54.965 29.467,54.965 32.467,54.965 35.467,54.965 44.467,54.965 47.467,54.965 65.467,54.965 80.467,54.965 83.467,54.965 86.467,54.965 89.467,54.965 92.467,54.965 95.467,54.965 98.467,54.965 101.467,54.965 104.467,54.965 107.467,54.965 3.967,57.965 6.967,57.965 9.967,57.965 12.967,57.965 15.967,57.965 18.967,57.965 21.967,57.965 24.967,57.965 27.967,57.965 30.967,57.965 33.967,57.965 42.967,57.965 45.967,57.965 57.967,57.965 60.967,57.965 66.967,57.965 69.967,57.965 72.967,57.965 75.967,57.965 78.967,57.965 81.967,57.965 84.967,57.965 87.967,57.965 90.967,57.965 93.967,57.965 96.967,57.965 99.967,57.965 102.967,57.965 105.967,57.965 2.467,60.965 5.467,60.965 8.467,60.965 11.467,60.965 14.467,60.965 17.467,60.965 20.467,60.965 23.467,60.965 29.467,60.965 38.467,60.965 41.467,60.965 44.467,60.965 56.467,60.965 59.467,60.965 65.467,60.965 71.467,60.965 74.467,60.965 80.467,60.965 83.467,60.965 86.467,60.965 89.467,60.965 92.467,60.965 95.467,60.965 98.467,60.965 101.467,60.965 104.467,60.965 107.467,60.965 3.967,63.965 6.967,63.965 9.967,63.965 12.967,63.965 15.967,63.965 18.967,63.965 21.967,63.965 24.967,63.965 48.967,63.965 54.967,63.965 78.967,63.965 81.967,63.965 84.967,63.965 87.967,63.965 90.967,63.965 93.967,63.965 96.967,63.965 99.967,63.965 102.967,63.965 105.967,63.965 2.467,66.965 5.467,66.965 8.467,66.965 11.467,66.965 20.467,66.965 23.467,66.965 29.467,66.965 41.467,66.965 44.467,66.965 50.467,66.965 56.467,66.965 80.467,66.965 83.467,66.965 86.467,66.965 89.467,66.965 98.467,66.965 101.467,66.965 104.467,66.965 107.467,66.965 3.967,69.965 6.967,69.965 9.967,69.965 21.967,69.965 24.967,69.965 33.967,69.965 42.967,69.965 45.967,69.965 48.967,69.965 78.967,69.965 81.967,69.965 84.967,69.965 87.967,69.965 99.967,69.965 102.967,69.965 105.967,69.965 2.467,72.965 5.467,72.965 8.467,72.965 11.467,72.965 20.467,72.965 23.467,72.965 29.467,72.965 56.467,72.965 77.467,72.965 80.467,72.965 83.467,72.965 86.467,72.965 89.467,72.965 98.467,72.965 101.467,72.965 104.467,72.965 107.467,72.965 3.967,75.965 6.967,75.965 9.967,75.965 12.967,75.965 15.967,75.965 18.967,75.965 21.967,75.965 24.967,75.965 27.967,75.965 42.967,75.965 45.967,75.965 48.967,75.965 51.967,75.965 54.967,75.965 78.967,75.965 81.967,75.965 84.967,75.965 87.967,75.965 90.967,75.965 93.967,75.965 96.967,75.965 99.967,75.965 102.967,75.965 105.967,75.965 2.467,78.965 5.467,78.965 8.467,78.965 11.467,78.965 14.467,78.965 17.467,78.965 20.467,78.965 23.467,78.965 26.467,78.965 29.467,78.965 32.467,78.965 35.467,78.965 38.467,78.965 41.467,78.965 44.467,78.965 47.467,78.965 50.467,78.965 53.467,78.965 56.467,78.965 77.467,78.965 80.467,78.965 83.467,78.965 86.467,78.965 89.467,78.965 92.467,78.965 95.467,78.965 98.467,78.965 101.467,78.965 104.467,78.965 107.467,78.965
  other v3: 66.018,69.803 68.299,69.803 67.183,70.993 66.018,72.089 68.304,72.089
NetC3_1: C3.1 R3.2 U1.5 | length 4.8
  Top Layer w0.2: U1.5 12.484,21.209 C3.1 14.885,21.186 R3.2
NetC3_2: C3.2 R1.1 | length 1.9
  Top Layer w0.2: C3.2 16.531,21.232 R1.1
NetC4_1: C4.1 R2.1 | length 2
  Top Layer w0.2: C4.1@92.291,28.618 C4.1@92.334,28.575
  Top Layer w0.254: C4.1 92.164,26.967 R2.1
NetC4_2: C4.2 R4.2 U2.5 | length 5.3
  Top Layer w0.2: R4.2 93.764,30.711 C4.2 93.969,28.624 U2.5
NetC5_1: C5.1 U3.1 | length 2.3
  Top Layer w0.2: U3.1 69.202,18.813 C5.1
NetC23_2: C23.2 D2.3 R6.1 R8.2 R9.2 | length 9
  Top Layer w0.2: D2.3 34.487,71.333 37.693,71.333 R6.1 ; R9.2 R6.1 ; C23.2 39.572,71.429 R8.2 37.804,71.444 R6.1
NetC24_2: C24.2 R7.1 R10.2 U6.25 | length 11.2
  Top Layer w0.2: C24.2 R10.2@39.205,53.683 ; R10.2 R7.1 43.688,53.721 44.971,52.438 U6.25
  Top Layer w0.254: R10.2@39.205,53.683 R10.2
NetC25_2: C25.2 R11.2 U5.2 U6.26 | length 13.6
  Top Layer w0.2: C25.2 36.299,51.727 R11.2 36.41,51.662 U5.2 47.761,51.662 U6.26
NetC26_2: C26.2 U6.7 | length 5.5
  Top Layer w0.2: U6.7 C26.2
NetJ5_3: J5.3 U6.1 | length 10.8
  Top Layer w0.2: J5.3@59.045,35.195 U6.1
NetJ5_4: J5.4 U6.12 | length 24.1
  Top Layer w0.2: v1(57.404,46.838) 57.404,55.657 U6.12 U6.12@57.627,55.88
  Bottom Layer w0.2: v1(57.404,46.838) 57.404,38.786 58.039,38.151 58.039,33.797 J5.4
NetJ5_5: J5.5 U6.44 | length 9.5
  Top Layer w0.2: J5.5@56.655,35.194 56.655,39.243 57.455,40.043 U6.44
NetJ5_6: J5.6 U6.35 | length 14.6
  Top Layer w0.2: U6.35 50.255,40.747 50.743,40.259 v1(50.743,40.386)
  Bottom Layer w0.2: v1(50.743,40.386) 55.372,35.757 55.372,33.909 56.627,32.654 J5.6
NetJ5_7: J5.7 U6.43 | length 10.2
  Top Layer w0.2: J5.7@54.115,35.194 54.115,37.859 56.655,40.399 U6.43
NetJ5_8: J5.8 U6.32 | length 19.2
  Top Layer w0.2: v1(46.863,43.053) 45.847,44.069 45.847,46.031 46.654,46.838 U6.32
  Bottom Layer w0.2: v1(46.863,43.053) 52.832,37.084 52.832,33.655 53.833,32.654 J5.8
NetJ5_9: J5.9 U6.42 | length 11
  Top Layer w0.2: J5.9 51.562,36.322 55.855,40.615 U6.42
NetJ5_10: J5.10 U6.13 | length 28.7
  Top Layer w0.2: J5.10 50.419,33.797 50.419,36.195 53.118,38.894 v1(53.118,39.005) ; v1(56.642,53.848) U6.13@56.642,55.695
  Top Layer w0.254: U6.13@56.642,55.695 U6.13
  Bottom Layer w0.2: v1(53.118,39.005) 51.816,40.307 51.816,51.562 54.102,53.848 v1(56.642,53.848)
NetJ5_11: J5.11 U6.41 | length 12.7
  Top Layer w0.2: J5.11@49.035,35.194 49.035,36.519 52.559,40.043 54.267,40.043 55.055,40.831 U6.41
NetJ5_12: J5.12 U6.34 | length 12.9
  Top Layer w0.2: J5.12 47.761,33.915 47.761,37.982 49.455,39.676 U6.34
NetJ5_13: J5.13 U6.33 | length 11.4
  Top Layer w0.2: J5.13 46.482,40.64 47.785,41.943 U6.33
NetJ5_14: J5.14 U6.31 | length 17.4
  Top Layer w0.2: J5.14 45.212,33.924 45.212,46.412 46.438,47.638 U6.31
NetJ5_15: J5.15 U6.27 | length 26.9
  Top Layer w0.2: v1@41.091,43.053 38.297,45.847 38.297,50.038 38.74,50.481 41.783,50.481 42.196,50.894 47.785,50.894 U6.27
  Bottom Layer w0.2: v1(41.275,42.926) 43.942,40.259 J5.15
NetJ5_16: J5.16 U6.30 | length 19.3
  Top Layer w0.2: J5.16 42.672,33.924 42.672,36.627 44.609,38.564 44.609,46.673 46.374,48.438 U6.30
NetJ7_1: J7.1 R12.2 | length 11.2
  Top Layer w0.2: J7.1@86.821,5.421 86.821,10.421 R12.2
NetP1_1: P1.1 R8.1 U6.18 | length 42.8
  Top Layer w0.2: P1.1 27.432,73.406 30.353,76.327 40.005,76.327 41.487,74.845 R8.1 43.155,71.444 v1(49.784,64.815) ; v1(52.655,62.738) 52.655,56.152 52.483,55.98 52.705,55.758 U6.18@52.66,55.713
  Top Layer w0.254: U6.18 U6.18@52.66,55.713
  Bottom Layer w0.2: v1(49.784,64.815) 51.861,62.738 v1(52.655,62.738)
NetP1_4: P1.4 U6.21 | length 28.9
  Top Layer w0.2: U6.21 50.255,59.399 v1(50.419,59.563)
  Bottom Layer w0.2: P1.4 45.72,64.262 v1(50.419,59.563)
NetP1_5: P1.5 U6.22 | length 26.8
  Top Layer w0.2: U6.22 v1(49.455,59.563)
  Bottom Layer w0.2: P1.5 47.296,61.722 v1(49.455,59.563)
NetR9_1: R9.1 SW1.3 SW1.4 | length 9.5
  Top Layer w0.2: SW1.3 SW1.4 35.489,67.761 R9.1
NetR12_1: R12.1 U6.23 | length 56
  Top Layer w0.2: U6.23 48.942,54.038 49.276,53.704 49.276,51.667 50.016,50.927 v1(52.578,50.927) ; v1(61.722,45.339) 61.722,45.212 86.821,20.113 R12.1
  Bottom Layer w0.2: v1(52.578,50.927) 56.007,50.927 61.595,45.339 v1(61.722,45.339)
NetR13_1: R13.1 U7.10 | length 2.9
  Top Layer w0.2: R13.1 U7.10
NetU1_1: U1.1 U2.1 U6.8 | length 150
  Top Layer w0.2: v1(27.813,19.431) v1(27.813,24.511) ; U6.8 63.64,51.638 66.612,54.61 v1(74.422,54.61) ; v1(88.646,19.431) v1(88.646,32.258)
  Bottom Layer w0.2: U1.1 24.1,28.224 v1(27.813,24.511) ; v1(27.813,19.431) v1(88.646,19.431) 94.645,19.431 U2.1 ; v1(74.422,54.61) 88.646,40.386 v1(88.646,32.258)
NetU4_6: U4.6 U6.24 | length 57.7
  Top Layer w0.2: v1(43.561,28.575) 48.768,23.368 48.768,15.748 48.599,15.579 U4.6 ; v1(45.085,53.975) 45.822,53.238 U6.24
  Bottom Layer w0.2: v1(43.561,28.575) 38.735,28.575 36.576,30.734 36.576,51.943 38.608,53.975 v1(45.085,53.975)
NetU6_2: U6.2 U7.4 | length 39.9
  Top Layer w0.2: U6.2 71.12,46.838 77.089,52.807 77.089,70.042 76.69,70.441 U7.4
NetU6_3: U6.3 U7.11 | length 38.7
  Top Layer w0.2: v1(58.547,76.454) 60.226,76.454 U7.11 ; U6.3 64.63,47.638 v1(64.643,47.625)
  Bottom Layer w0.2: v1(58.547,76.454) 64.643,70.358 v1(64.643,47.625)
NetU6_4: U6.4 U7.13 | length 34.8
  Top Layer w0.2: v1(58.597,74.499) U7.13 ; U6.4 59.176,48.387 v1(63.881,48.387)
  Bottom Layer w0.2: v1(58.597,74.499) 63.881,69.215 v1(63.881,48.387)
NetU6_5: U6.5 U7.22 | length 22.7
  Top Layer w0.2: U6.5 59.137,49.25 v1(66.294,49.25) ; v1(66.267,62.943) U7.22
  Bottom Layer w0.2: v1(66.267,62.943) 66.267,49.277 v1(66.294,49.25)
NetU6_9: U6.9 U7.15 | length 27.7
  Top Layer w0.2: v1(58.674,72.467) U7.15 ; U6.9@59.138,52.451 v1(63.246,52.451)
  Top Layer w0.254: U6.9 U6.9@59.138,52.451
  Bottom Layer w0.2: v1(58.674,72.467) 63.246,67.895 v1(63.246,52.451)
NetU6_14: U6.14 U7.18 | length 17
  Top Layer w0.2: U6.14 55.855,67.412 57.862,69.419 U7.18
NetU6_19: U6.19 U7.16 | length 24.2
  Top Layer w0.2: U6.19 v1(51.855,65.913) ; v1(51.855,71.429) 60.281,71.429 U7.16
  Bottom Layer w0.2: v1(51.855,65.913) v1(51.855,71.429)
NetU6_20: U6.20 U7.17 | length 21.9
  Top Layer w0.2: U6.20 51.055,59.089 51.278,59.312 51.278,59.814 51.055,60.037 51.055,66.549 54.941,70.435 U7.17
Vbatt: J5.18 J6.1 R5.2 U4.5 | length 31.7
  Top Layer w0.2: v1(39.385,25.512) 39.385,24.115 42.799,20.701 42.799,16.757 43.871,15.685 44.586,15.685 R5.2@45.151,15.12 ; v1(41.402,25.512) J5.18 ; R5.2@45.151,15.052 R5.2 46.328,16.229 U4.5
  Top Layer w2: J6.1 45.151,15.052 R5.2@45.151,15.12
  Bottom Layer w0.2: v1(39.385,25.512) v1(41.402,25.512)
VSW: C5.2 D1.1 L1.1 U3.8 | length 17
  Top Layer w0.5: U3.8 D1.1 C5.2 67.619,17.344 68.901,16.062 L1.1
pads on no net: D2.2 U3.2 U3.3 U3.5 U6.10 U6.11 U6.15 U6.36 U6.37 U6.38 U7.1 U7.2 U7.3 U7.5 U7.6 U7.7 U7.8 U7.14 U7.19 U7.21 U7.24 U7.25 U7.26 U7.27
copper on no net:
  other v4: 25,7 70,7 15,70 95,70

## Polygon pours and split planes (outlines as drawn)
GND on Top Layer "Top Layer GND" (solid, remove dead copper, pour order 12): 0,0 0,87.249 109.474,87.249 109.474,0
GND on Bottom Layer "GND_L02_P013" (solid, remove dead copper, pour order 13): 0,0 0,87.249 109.474,87.249 109.474,0

## Keep-outs
Top Layer:
  region: -21.082,68.326
  lines w0.254: 18.448,70.042 cw(c15,70) 18.448,70.046 ; 28.448,7.042 cw(c25,7) 28.448,7.046 ; 73.448,7.042 cw(c70,7) 73.448,7.046 ; 98.448,70.042 cw(c95,70) 98.448,70.046
Bottom Layer:
  lines w0.254: 18.448,70.042 cw(c15,70) 18.448,70.046 ; 28.448,7.042 cw(c25,7) 28.448,7.046 ; 73.448,7.042 cw(c70,7) 73.448,7.046 ; 98.448,70.042 cw(c95,70) 98.448,70.046

## Other copper
Top Layer:
  pour cut-out: 57.882,62.801 77.089,62.801 77.089,80.645 109.474,80.645 109.474,87.249 0,87.249 0,80.645 57.941,80.645
  text "18140A Totem Lumineux" at 1.27,84.328 h1.52
  text "Nicolas Furst" at 1.27,81.788 h1.52
Bottom Layer:
  pour cut-out: 0,87.249 109.474,87.249 109.474,80.645 0,80.645
  text "18140A Totem Lumineux" at 31.75,84.328 h1.52
  text "Nicolas Furst" at 31.75,81.788 h1.52

## Silkscreen, mask and mechanical layers (free items; w line width, h text height)
Top Overlay:
  text "-" at 16.764,42.291 h3
  text "-" at 91.567,41.529 h3
  text "+" at 16.637,37.719 h3
  text "+" at 91.44,36.957 h3
  text "Matrice 1" at 107.696,20.066 h1.7 r90
  text "+" at 99.949,18.542 h3 r270
  text "-" at 4.191,17.907 h3 r180
  text "Matrice 2" at 2.667,17.78 h1.7 r90
  text "+" at 39.714,16.129 h3 r270
  text "-" at 104.902,15.875 h3
  text "+" at 9.398,15.494 h3 r90
  text "-" at 57.023,13.462 h3
  text "LED OUT" at 82.169,2.54 h1.5 r90
  text "12VDC" at 39.116,0.762 h2 r90
Mechanical 1:
  the board outline again, w0.1

## Text inside footprints (layer, text, board x,y; h text height)
J5: Top Overlay "1" at 61.595,37.211 h1.02
P1: Top Overlay "1" at 25.146,71.628 h1.02
U5: Top Overlay "C" at 38.805,47.852 h0.76 r270; Mechanical 15 "C" at 38.805,47.852 h0.76 r270